# Altium PCB PDB_PCB.PcbDoc (part 2 of 2)
Units mil, origin at the board's own origin, x right, y up, seen from the top; angles counter-clockwise.
Board outline 5500 x 4505 mil, 2 copper layers (Top Layer, Bottom Layer); 322 components, 128 nets, 931 pads, 46 vias.
Unrouted connection lines stored in the file: 604.
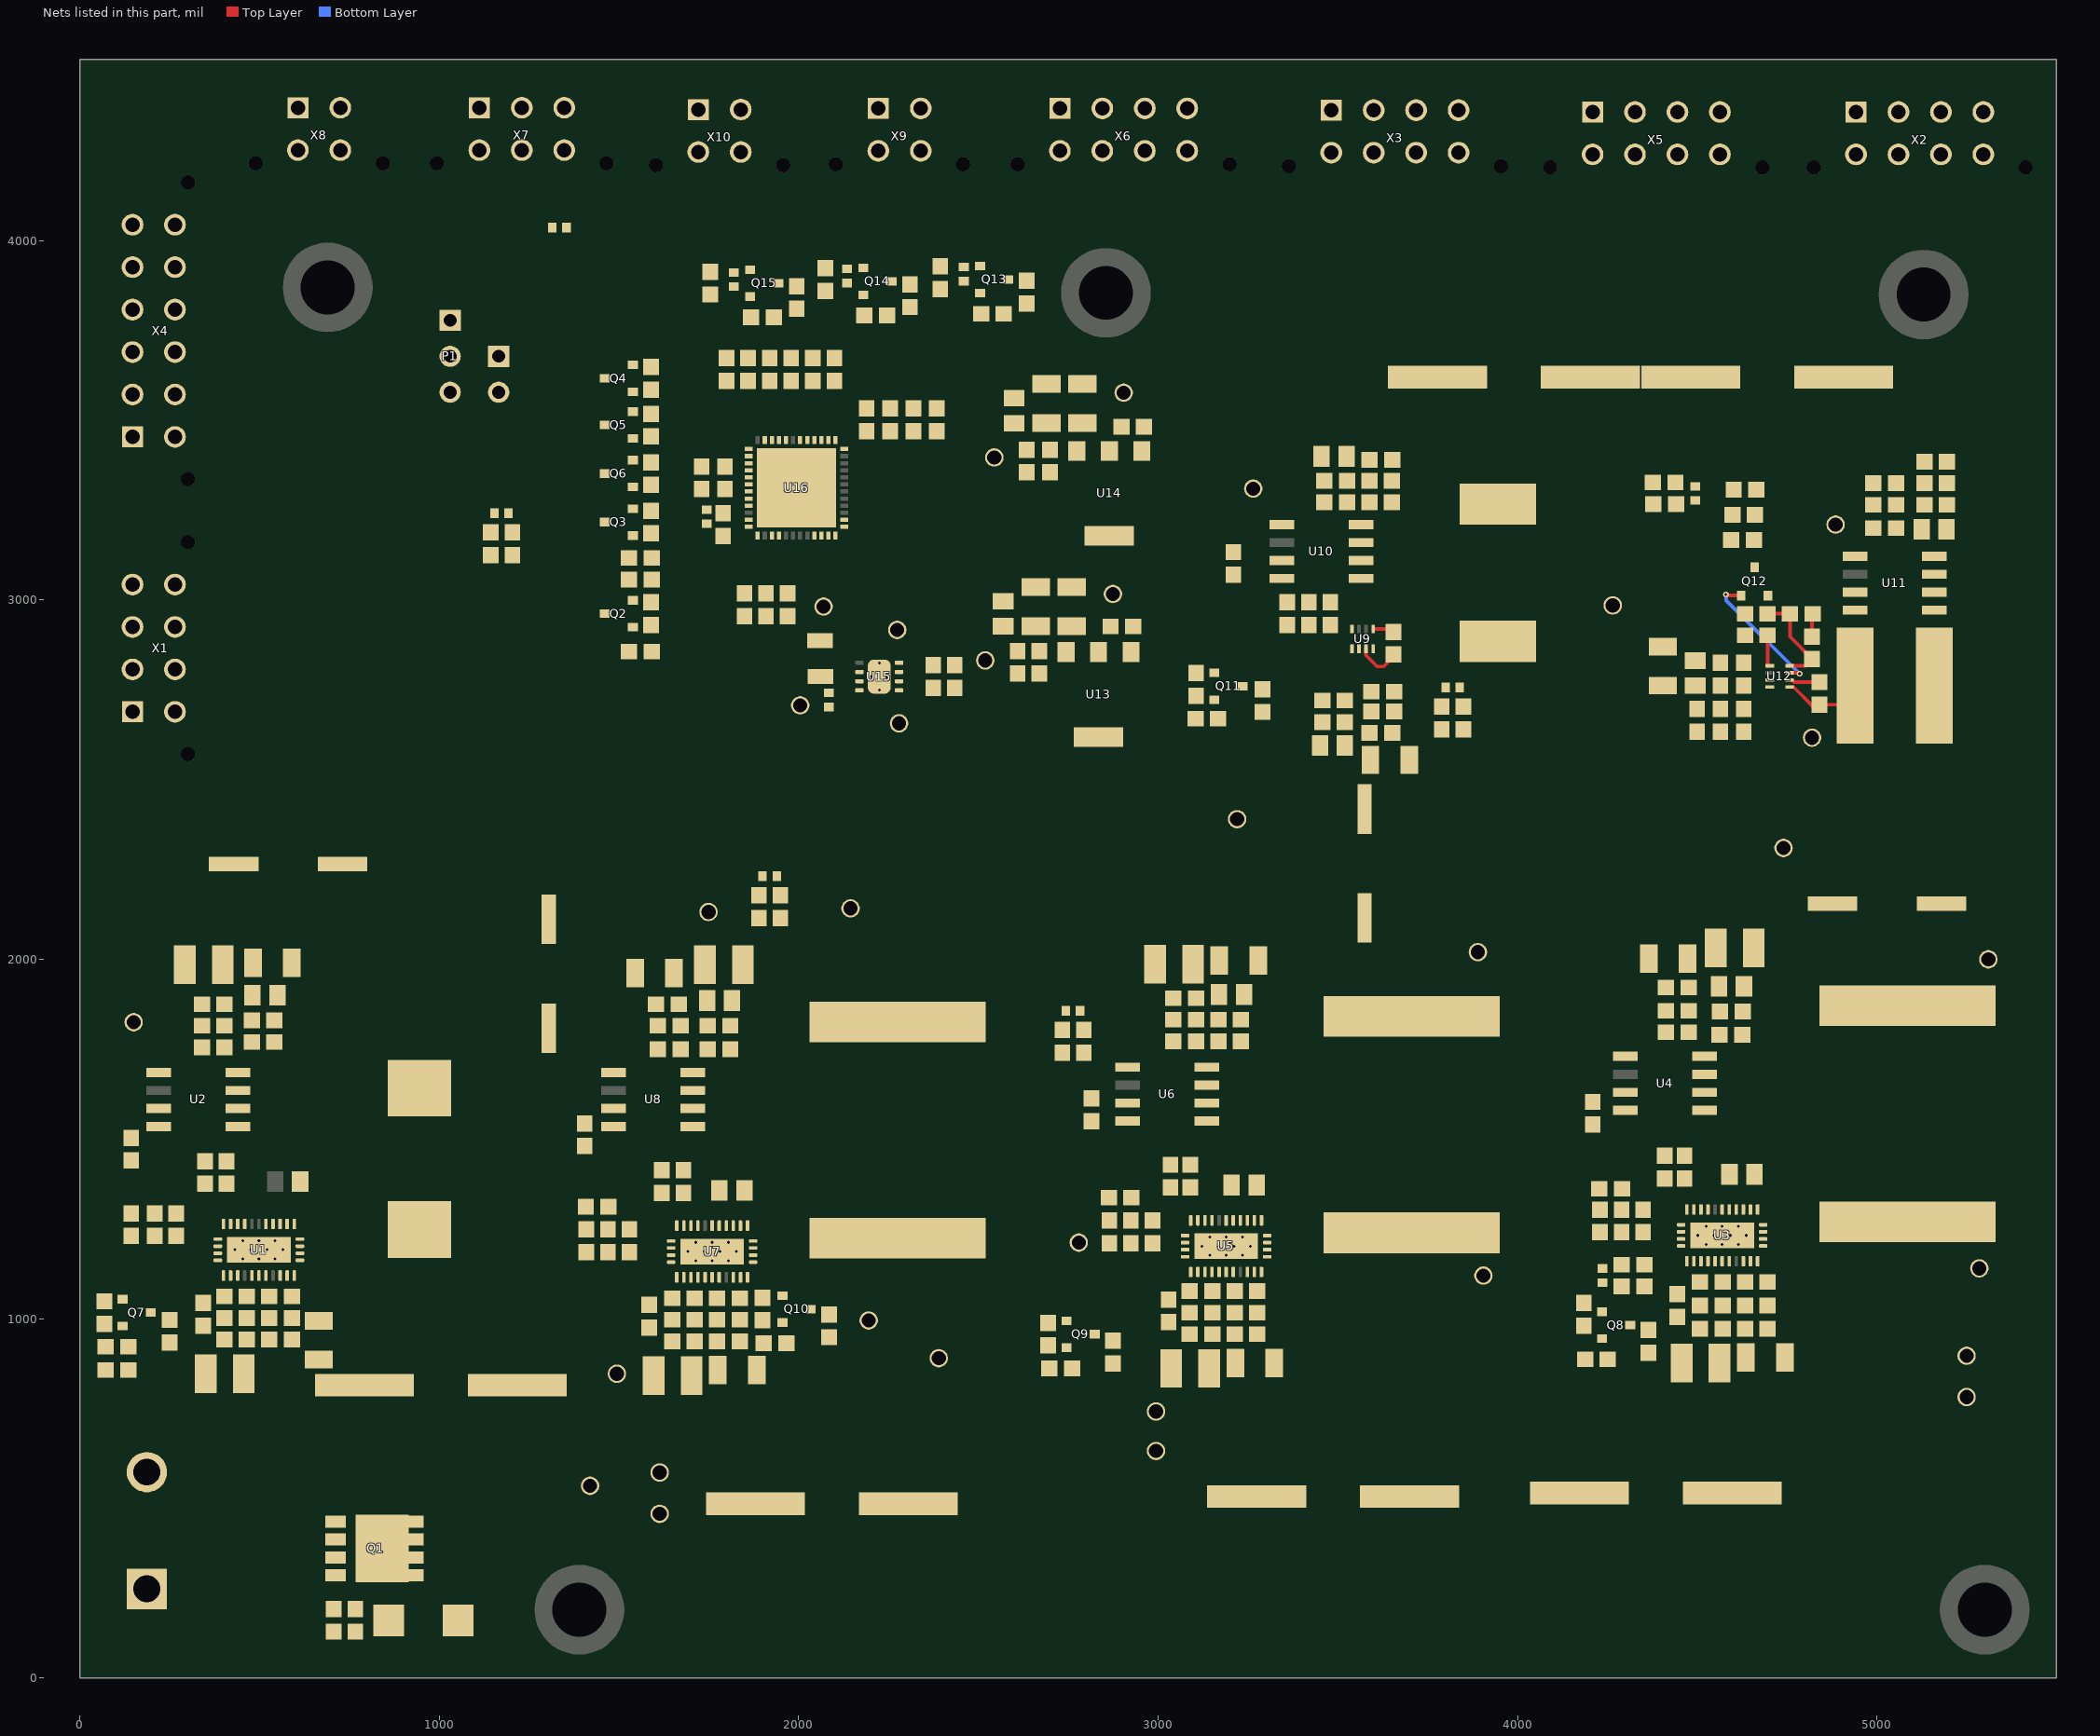
[diagram p2: the nets of this part, all layers, seen from the top]

## Part data
C1 C24 C47 C70 C102 C112: library part ELEC-100U-0001, "100 µF 100 V Aluminum Electrolytic Capacitors Radial, Can - SMD 2000 Hrs @ 85°C", Capacitance="100 uF", Manufacturer=Rubycon, Tolerance="+/- 20%", Voltage="100 V", Assembled?=No, ESR="idk check the datasheet i couldnt find it"
C2 C14: library part CAP-10U-0004, "10 µF ±10% 75V Ceramic Capacitor X7R 1210 (3225 Metric)", Capacitance="10 uF +/- 10%", Voltage Rating=75V
C3 C15: library part CAP-1U-0001, "1 µF ±10% 100V Ceramic Capacitor X7R 1206 (3216 Metric)", Capacitance="1 uF +/- 10%", Voltage=100V
C4 C11 C17 C23 C32 C37 C55 C60 C78 C83 C97 C100 C106 C110 C111 C116 C123 C126 C127 C134 C140 C142 C143 C144 C146 C150: library part CAP-100N-0001, "CAP CER 0.1UF 100V X7R 0603", Capacitance="100nF +/-10%", Manufacturer=YAGEO, Package Size=0603, Temperature Coefficient=X7R, Voltage Rating=100V, Assembled?=no, Manufacturer Part Number=CC0603KRX7R0BB104
C5 C18 C96 C105 C115 C122: library part CAP-10N-0002, "CAP CER 10000PF 100V C0G 0603", Capacitance="10nF +/-5%", Manufacturer="TDK Corporation", Package Size=0603, Temperature Coefficient=C0G/NP0, Voltage Rating=100V, Assembled?=no, Manufacturer Part Number=C1608C0G2A103J080AC
C6 C19 C98 C104 C114 C124: library part CAP-1N-0001, "1000 pF ±10% 100V Ceramic Capacitor X7R 0603 (1608 Metric)", Capacitance="1 nF +/-10%", Voltage=100V
C7 C20 C30 C45 C53 C68 C76 C91 C99 C107 C117 C125: library part CAP-100P-0002, "100 pF ±5% 100V Ceramic Capacitor C0G, NP0 0603 (1608 Metric)", Capacitance="100 pF", Package Size=0603, Temp Coeff=C0G/NP0, Tolerance=+/-5%, Voltage=100V
C8 C21: library part CAP-10P-0001, "10 pF ±5% 50V Ceramic Capacitor C0G, NP0 0603 (1608 Metric)", Capacitance="10 pF +/- 5%", Manufacturer="Walshin Technology Corporation", Package Size=0603, Temperature Coefficient="C0G, NP0", Voltage Rating=50V, Assembled?=Yes, Manufacturer Part Number=0603N100J500CT
C9: library part CAP-2.2U-0001, "2.2 µF ±10% 50V Ceramic Capacitor X5R 0603 (1608 Metric)", Capacitance="2.2 uF", oltage=50V
C10: library part CAP-33N-0001, "0.033 µF ±10% 50V Ceramic Capacitor X7R 0603 (1608 Metric)", Capacitance="33nF +/-10%", Manufacturer=YAGEO, Package Size=0603, Temperature Coefficient=X7R, Voltage Rating=50V, Assembled?=no, Manufacturer Part Number=CC0603KRX7R9BB333
C12 C16 C34 C41 C57 C64 C80 C87 C95 C103 C113 C121 C133 C139: library part CAP-0.47U-0001, "0.47 µF ±10% 100V Ceramic Capacitor X7R 0805 (2012 Metric)", Capacitance="0.47 uF", Package Size=0805, Temperature Coefficient=X7R, Tolerance="+/- 10%", Voltage=100V, Assembled?=No
C13: library part ELEC-220U-0003, "220 µF 50 V Aluminum Electrolytic Capacitors Radial, Can - SMD 2000 Hrs @ 105°C", Capacitance="220 uF +/- 20%", Voltage Rating=50V, Size=.406inx.406in*.413in
C22 C33 C56 C79: library part CAP-1P-0001, "1 pF ±0.25pF 100V Ceramic Capacitor C0G, NP0 0603 (1608 Metric)", Capacitance="1 pF", Package Size=0603, Temperature Coefficient=C0G/NP0, Tolerance="+/- 0.25 pF", Voltage=100V, Assembled?=No
C25 C39 C48 C62 C71 C85: library part CAP-10U-0004, "10 µF ±10% 75V Ceramic Capacitor X7R 1210 (3225 Metric)", Capacitance="10 uF", Voltage Rating=75V
C26 C40 C49 C63 C72 C86: library part CAP-1U-0001, "1 µF ±10% 100V Ceramic Capacitor X7R 1206 (3216 Metric)", Capacitance="1 uF", Voltage=100V
C27 C42 C50 C65 C73 C88: library part CAP-100N-0001, "CAP CER 0.1UF 100V X7R 0603", Capacitance=100nF, Manufacturer=YAGEO, Package Size=0603, Temperature Coefficient=X7R, Voltage Rating=100V, Assembled?=no, Manufacturer Part Number=CC0603KRX7R0BB104
C28 C43 C51 C66 C74 C89: library part CAP-10N-0002, "CAP CER 10000PF 100V C0G 0603", Capacitance=10nF, Manufacturer="TDK Corporation", Package Size=0603, Temperature Coefficient=C0G/NP0, Voltage Rating=100V, Assembled?=no, Manufacturer Part Number=C1608C0G2A103J080AC
C29 C44 C52 C67 C75 C90: library part CAP-1N-0001, "1000 pF ±10% 100V Ceramic Capacitor X7R 0603 (1608 Metric)", Capacitance="1 nF", Voltage=100V
C31 C46 C54 C69 C77 C92: library part CAP-10P-0001, "10 pF ±5% 50V Ceramic Capacitor C0G, NP0 0603 (1608 Metric)", Capacitance="10 pF", Manufacturer="Walshin Technology Corporation", Package Size=0603, Temperature Coefficient="C0G, NP0", Voltage Rating=50V, Assembled?=Yes, Manufacturer Part Number=0603N100J500CT
C35 C58 C81 C94 C120 C132 C138 C145 C147: library part CAP-1U-0002, "1 µF ±10% 50V Ceramic Capacitor X7R 0603 (1608 Metric)", Capacitance="1 uF", Package Size=0603, Voltage=50V
C36 C59 C82: library part CAP-33N-0001, "0.033 µF ±10% 50V Ceramic Capacitor X7R 0603 (1608 Metric)", Capacitance=33nF, Manufacturer=YAGEO, Package Size=0603, Temperature Coefficient=X7R, Voltage Rating=50V, Assembled?=no, Manufacturer Part Number=CC0603KRX7R9BB333
C38 C61 C84: library part ELEC-220U-0003, "220 µF 50 V Aluminum Electrolytic Capacitors Radial, Can - SMD 2000 Hrs @ 105°C", Capacitance="220 uF", Voltage Rating=50V, Size=.406inx.406in*.413in
C93 C119 C130 C131 C136 C137: library part CAP-10U-0001, "10 µF ±10% 50V Ceramic Capacitor X7R 1206 (3216 Metric)", Capacitance="10uF +/-20%", Manufacturer="Samsung Electro-Mechanics", Package Size=1206, Temperature Coefficient=X7R, Voltage Rating=50V, Assembled?=no, Manufacturer Part Number=CL31B106KBHNNNE
C101: library part CAP-100N-0002-JLC, "100V 100nF X7R ±10% 0603 Multilayer Ceramic Capacitors MLCC - SMD/SMT ROHS", Capacitance="100 nF +/- 10%", JLC Part Number=C113803, Voltage=100V, Assembled?=yes
C108 C109 C118 C128: library part CAP-47P-0001, "47 pF ±5% 100V Ceramic Capacitor C0G, NP0 0603 (1608 Metric)", Capacitance="47 pF +/- 5%", Voltage Rating=100V
C129 C135: library part CAP-0.33uF-0001, "0.33 µF ±10% 50V Ceramic Capacitor X7R 0603 (1608 Metric)", Capacitance="0.33 uF", Manufacturer="TDK Corporation", Temperature Coefficient=X7R, Tolerance="+/- 10%", Voltage=50V, Manufacturer Part Number=CGA3E3X7R1H334K080AB
C141 C149: library part CAP-4.7U-0001, "4.7 µF ±10% 25V Ceramic Capacitor X5R 0603 (1608 Metric)", Capacitance="4.7uF +/-10%", Manufacturer="Taiyo Yuden", Package Size=0603, Temperature Coefficient=X5R, Voltage Rating=25V, Assembled?=no, Manufacturer Part Number=TMK107BBJ475KA-T
C148: library part CAP-10N-0001, "10000 pF ±10% 100V Ceramic Capacitor X7R 0402 (1005 Metric)", Capacitance="10nF +/-10%", Manufacturer=YAGEO, Package Size=0402, Temperature Coefficient=X7R, Voltage Rating=100V, Assembled?=no, Manufacturer Part Number=CC0402KRX7R0BB103
D1: library part DIO-69.4V-0001, "69.4V Clamp 8.7A Ipp Tvs Diode Surface Mount DO-214AA (SMBJ)", Breakdown VOltage=47.8V, Package="DO-214AA (SMBJ)", Peak pulser current=8.7A, Reverse working maximum voltage=43V, Channels=Bidirectional, Vclamp=69.4V
D2 D3 D4 D5 D6 D7 D8 D9 D10: library part LED_Amber_0001, "CAP CER 0.1UF 100V X7R 0603", Color=Amber, Current Rating=20mA, Manufacturer="Wurth Electronik", Package Size=0603, Assembled?=no, Manufacturer Part Number=150060AS75000, Vf=2V
J1: library part CON-2POS-0003
L1: library part PWRIND-10U-0002, "10 µH Shielded Drum Core, Wirewound Inductor 10 A 16.8mOhm Max Nonstandard", Inductance="10 uH", Tolerance="+/- 20%", Assembled?=No, DCI="10 A", DCR="16.8 mOhm", Isat=16A
L2 L3 L4: library part PWRIND-8.2U-0002, "8.2 µH Shielded Molded Inductor 18 A 10.66mOhm Max Nonstandard", Inductance="8.2 uH", Tolerance=+/-20%, DCI=18A, DCR="10.66 mOhm", Isat=25A
L5: library part PWRIND-3.3U-0003, "3.3 µH Shielded Drum Core, Wirewound Inductor 6.8 A 15mOhm Max Nonstandard", Inductance="3.3 uH", Tolerance=30%, Assembled?=No, DCI="6.8 A", DCR="15 mOhm", Isat=6.5A
L6: library part PWRIND-1U-0001, "1 µH Semi-Shielded Drum Core, Wirewound Inductor 7.8 A 10mOhm Max Nonstandard", Inductance="1 uH", Tolerance=30%, Assembled?=No, DCI=7.8A, DCR="10 mOhm", Isat=11A
P1: "Header, 3-Pin", LatestRevisionDate=17-Jul-2002, LatestRevisionNote="Re-released for DXP Platform.", Publisher="Altium Limited"
P2: "Header, 2-Pin", LatestRevisionDate=17-Jul-2002, LatestRevisionNote="Re-released for DXP Platform.", Publisher="Altium Limited"
Q1: library part NMOS-60A-0001, "N-Channel 60 V 60A (Tc) 81W (Tc) Surface Mount 8-SOP Advance (5x5)", Drain Current=60A, Package=8-PowerVDFN, Vdss=60V, Vgs="2.5V @ 220uA", Vgs(Max)=20V
Q2 Q3 Q4 Q5 Q6 Q7 Q8 Q9 Q10 Q11 Q12 Q13 Q14 Q15: library part NMOS-200MA-0001, "MOSFET N-CH 60V 200MA SOT23", Manufacturer=Toshiba, Package=SOT-23-3, Assembled?=no, FET type=N-Channel, Id-Continuous=200mA, Manufacturer Part Number=T2N7002AK,LM, Rds On-Max=3.9Ohm, VDS-Max=60V, Vgs-Max=20V
R1: library part RES-200K-0001, "200 kOhms ±1% 0.1W, 1/10W Chip Resistor 0603 (1608 Metric) Automotive AEC-Q200 Thick Film", Manufacturer="Panasonic Electronic Components", Package Size=0603, Power Rating="0.1 W", Resistance="200k +/- 1%", Assembled?=Yes, MFP=ERJ-3EKF2003V
R2 R10 R16 R20 R23 R30 R32 R39 R41: library part RES-100K-0003, "100 kOhms ±1% 0.1W, 1/10W Chip Resistor 0603 (1608 Metric) Moisture Resistant Thick Film", Package Size=0603, Power="1/10 W", Resistance="100 kOhm", Tolerance="+/- 1%", Assembled?=No
R3: library part RES-10K-0001, "RES 10K OHM 1% 1/16W 0402", Manufacturer=YAGEO, Package Size=0402, Power Rating=1/16W, Resistance="10kOhm +/-1%", Assembled?=no, Manufacturer Part Number=RC0402FR-0710KL
R4 R5 R6 R7 R8: library part RES-0-0001, "0 Ohms Jumper 0.1W, 1/10W Chip Resistor 0603 (1608 Metric) Automotive AEC-Q200 Thick Film", Package Size=0603, Power="1/10 W", Resistance=10kOhm
R9 R18 R27 R36: library part RES-2.15M-0001, "2.15 MOhms ±1% 0.1W, 1/10W Chip Resistor 0603 (1608 Metric) Moisture Resistant Thick Film", Package Size=0603, Power="1/10 W", Resistance="2.15 MOhm", Tolerance=+/-1%, Assembled?=No
R11 R22 R31 R40 R52 R60 R61 R62: library part RES-100-0002, "100 Ohms ±1% 0.1W, 1/10W Chip Resistor 0603 (1608 Metric) Automotive AEC-Q200 Thick Film", Manufacturer=YAGEO, Package Size=0603, Power Rating=1/10W, Resistance="100Ohm +/-1%", Assembled?=no, Manufacturer Part Number=AC0603FR-10100RL
R12 R14 R19 R24 R28 R33 R37 R42 R46 R47 R50 R54 R57 R66 R67 R68: library part RES-10K-0002, "RES SMD 10K OHM 1% 1/10W 0603", Manufacturer=YAGEO, Package Size=0603, Power Rating=1/10W, Resistance="10kOhm +/-1%", Assembled?=no, Manufacturer Part Number=RC0603FR-0710KP
R13 R26 R35 R44: library part RES-76.8K-0001, "76.8 kOhms ±1% 0.1W, 1/10W Chip Resistor 0603 (1608 Metric) Moisture Resistant Thick Film", Manufacturer=Yageo, Package Size=0603, Power="1/10 W", Resistance="76.8 kOhm", Tolerance="+/- 1%"
R15 R21 R29 R38 R48 R56: library part THERM-47K-0001, "PTC Thermistor 47 kOhms 0402 (1006 Metric)", Manufacturer="Texas Instruments", Package Size=0402, Resistance="47k +/- 1%", Manufacturer Part Number=TMP6431DECR
R17: library part RES-4.32K-0001, "4.32 kOhms ±1% 0.1W, 1/10W Chip Resistor 0603 (1608 Metric) Moisture Resistant Thick Film", Package Size=0603, Power="1/10 W", Resistance="4.32 kOhm", Tolerance=+/-1%, Assembled?=No
R25 R34 R43 R51: library part RES-9.09K-0001, "9.09 kOhms ±1% 0.1W, 1/10W Chip Resistor 0603 (1608 Metric) Moisture Resistant Thick Film", Package Size=0603, Power="1/10 W", Resistance="9.09 kOhm", Tolerance=+/-1%, Assembled?=No
R45: library part RES-220-003, "220 Ohms ±5% 0.1W, 1/10W Chip Resistor 0603 (1608 Metric) Automotive AEC-Q200, Moisture Resistant Thick Film", Package Size=0603, Power="1/10 W", Resistance="220 Ohm", Tolerance="+/- 5%"
R49: library part RES-73.2K-0001, "73.2 kOhms ±1% 0.1W, 1/10W Chip Resistor 0603 (1608 Metric) Moisture Resistant Thick Film", Package Size=0603, Power="1/10 W", Resistance="73.2 kOhm", Tolerance=1%, Assembled?=No
R53: library part RES-4.7K-0002, "RES SMD 4.7K OHM 1% 1/10W 0603", Manufacturer=YAGEO, Package Size=0603, Power Rating=1/10W, Resistance="4.7kOhm +/-1%", Assembled?=no, Manufacturer Part Number=AF0603FR-074K7L
R55: library part RES-30.9K-0001, "30.9 kOhms ±1% 0.1W, 1/10W Chip Resistor 0603 (1608 Metric) Moisture Resistant Thick Film", Package Size=0603, Power="1/10 W", Resistance="30.9 kOhm", Tolerance=1%, Assembled?=No
R58: library part RES-4.7K-0001, "RES SMD 4.7K OHM 1% 1/16W 0402", Manufacturer=YAGEO, Package Size=0402, Power Rating=1/16W, Resistance="4.7kOhm +/-1%", Assembled?=no, Manufacturer Part Number=RC0402FR-074K7P
R59: library part RES-120-0002, "120 Ohms ±1% 0.5W, 1/2W Chip Resistor 1206 (3216 Metric) Thick Film", Package Size=1206, Power="0.5 W", Resistance="120 Ohm", Tolerance=1%
R63 R64 R65: library part RES-33-0003-JLC, "100mW Thick Film Resistors ±100ppm/℃ ±1% -55℃~+155℃ 33Ω 0402  Chip Resistor - Surface Mount ROHS", JLC Part Number=C278594, Power="1/10 W", Resistance="33 Ohm +/- 1%", Assembled?=yes
R69 R70 R71 R72 R73 R74 R75 R76 R77 R78 R79 R80: library part RES-0-0001, "0 Ohms Jumper 0.1W, 1/10W Chip Resistor 0603 (1608 Metric) Automotive AEC-Q200 Thick Film", Package Size=0603, Resistance="0 Ohm"
TP1 TP2 TP3 TP4 TP5 TP6 TP7 TP8 TP9 TP10 TP11 TP12 TP13 TP14 TP15 TP16 TP17 TP18 TP19 TP20 TP21 TP22 TP23 TP24 TP25 TP26 TP27 TP28 TP29 TP30 TP31 TP32: library part TEST-POINT-0001, "Oranange PC Test Point, Miniature Phoisphor Bronze Silver Plating Through Hole Mounting Type"
U1: library part IC-BUCK-0006, "Buck Switching Regulator IC Positive Adjustable 1V 1 Output 5A 30-WFQFN Exposed Pad", Current=5A, Manufacturer="Texas Instruments", Package=30-WFQFN, Assembled?=no, Manufacturer Part Number=LM76005RNPR, Type=Buck
U2 U4 U6 U8 U10 U11: library part IC-CURRENT-0004, "Current Sensor 1 Channel Hall Effect Bidirectional 8-SOIC (0.154\", 3.90mm Width)", Supply Voltage=5V, Assembled?=No
U3 U5 U7: library part IC-BUCK-0006, "Buck Switching Regulator IC Positive Adjustable 1V 1 Output 5A 30-WFQFN Exposed Pad", Manufacturer="Texas Instruments", Package=30-WFQFN, Assembled?=no, Current=LM76005RNPR, Manufacturer Part Number=LM76005RNPR, Type=Buck
U9: library part IC-BUCK-0008, "Buck Switching Regulator IC Positive Adjustable 0.6V 1 Output 3A SOT-583", Current=3A, Manufacturer="Texaas Instruments", Package Size=SOT-583, Assembled?=no, Manufacturer Part Number=TPS563212DRLR, Type=Buck
U12: library part IC-BUCK-0010, "Buck Switching Regulator IC Positive Adjustable 0.8V 1 Output 3A SOT-583", Current=3A, Manufacturer="Texas Instruments", Assembled?=no, Manufacturer Part Number=TPS62933ODRLR, Type=Buck
U13: library part IC-LDO-5V-0003, "Linear Voltage Regulator IC Positive Fixed 1 Output 500mA SOT-223-4", Current="500 mA", Manufacturer="Texas Instruments", Package Size=SOT223-4, Assembled?=no, Manufacturer Part Number=UA78M05IDCYR, Type="Low dropout (LDO)"
U14: library part IC-LDO-3.3V-0002, "Linear Voltage Regulator IC Positive Fixed 1 Output 500mA SOT-223-4", Current="500 mA", Package=SOT-223-4, Vin=25V, Vout=3.3V
U15: library part IC-CAN-TRANSCEIVER-0002, "1/1 Transceiver CANbus 8-VSON (3x3)", Manufacturer="Texas Instrument", CAN Capability=FD-CAN, Manufacturer Part Number=TCAN1042HGDRBTQ1
U16: library part IC-STM32G431CBU6, "128KB 1.71V~3.6V ARM-MSeries 32KB 170MHz FLASH 42 UFQFPN-48(7x7) Microcontroller Units (MCUs/MPUs/SOCs) ROHS", Package=UFQFPN-48, Assembled?=no, Manufacturer Part Number=STM32G431CBU6
X1 X2 X3 X5 X6: library part "Micro-Fit Molex 8 Pin 2 Row Vertical", Package=43045-0812, DeviceName=43045-0812, DeviceSetName=HEADER_POS8_?, GateName_1=G$1, LibraryName=con-molex-micro-fit-3_0_2, SymbolName_1=HEADER_POS8
X4: library part HEADER_POS12_?43045-1212, Package=43045-1212, DeviceName=43045-1212, DeviceSetName=HEADER_POS12_?, GateName_1=G$1, LibraryName=con-molex-micro-fit-3_0_2, SymbolName_1=HEADER_POS12
X7: library part "Micro-Fit Molex 6 Pin 2 Row Vertical", Package=43045-0612, DeviceName=43045-0612, DeviceSetName=HEADER_POS6_?, GateName_1=G$1, LibraryName=con-molex-micro-fit-3_0_2, SymbolName_1=HEADER_POS6
X8 X9 X10: library part "Micro-Fit Molex 4 Pin 2 Row Vertical", Package=43045-0412, DeviceName=43045-0412, DeviceSetName=HEADER_POS4_?, GateName_1=G$1, LibraryName=con-molex-micro-fit-3_0_2, SymbolName_1=HEADER_POS4

## Free pads (board coordinates)
  round 250 hole 150: ""(690,3870) ""(1390,190) ""(2855,3855) ""(5130,3850) ""(5300,190)

## Via types
v1: diameter 11.81, hole 7.87, Top Layer to Bottom Layer, 44 vias
v2: diameter 16, hole 8, Top Layer to Bottom Layer, 2 vias

## Nets (pads, with @x,y where several pads share a name; then routed paths per layer and width w, separated by ;. In a path a pad name is that pad's centre, name@x,y a point inside that pad or via, vN(x,y) a via of type N, cw(c..) or ccw(c..) an arc to the next point about the centre after c; other vN are vias at no path point)
"3V3 TMP": R54.2 R56.2
3V3_BUCK_MAIN: C23.1 C37.1 C60.1 C83.1 C110.1 C111.2 C112.1 C113.1 C114.1 C115.1 C116.1 C117.1 C118.1 R3.1 TP23.1 U2.8 U4.8 U6.8 U8.8 U10.8 U11.3 U11.4 U11.8 X5.P$5 X5.P$6 X5.P$7 X5.P$8
3V3_BUCK_OUT: C128.1 L6.2 R52.1 R53.1 R55.1 U11.1 U11.2 | length 64.1
  Top Layer w10: C128.1@4819.47,2898.31 4819.47,2960.31 R55.1@4820.97,2961.81
5V: C130.1 C131.1 C132.1 C133.2 C134.1 C149.1 C150.1 TP25.1 U13.3 U15.3
5V_BUCK_MAIN: C102.1 C103.1 C104.1 C105.1 C106.1 C107.1 C108.1 TP21.1 U10.3 U10.4 X3.P$5 X3.P$6 X3.P$7 X3.P$8 X6.P$5 X6.P$6 X6.P$7 X6.P$8 X8.P$4
5V_BUCK_OUT: C109.2 L5.2 R45.1 R47.2 R49.1 U10.1 U10.2
5V_FB: C109.1 R49.2 R50.1 U9.8
5V_TEMP_OUT: R46.2 R48.2
12V_BUCK_EN: R27.1 R30.1 U5.18
12V_BUCK_FB: C56.2 R32.2 R34.1 TP14.1 U5.12
12V_BUCK_MAIN: C61.1 C62.1 C63.1 C64.1 C65.1 C66.1 C67.1 C68.1 C69.1 C93.1 C94.1 C95.1 C96.1 C97.1 C98.1 C99.1 C119.1 C120.1 C121.1 C122.1 C123.1 C124.1 C125.1 C129.1 C135.1 TP15.1 U6.3 U6.4 U9.2 U12.3 U13.1 U14.1
12V_BUCK_OUT: C56.1 C58.1 L3.2 R32.1 TP12.1 U5.9 U6.1 U6.2
12V_BUCK_PG: Q9.1 R33.1 U5.16
12V_BUCK_VCC: R31.1 R33.2 U5.8
12V_JETSON_EN: R18.1 R20.1 U3.18
12V_JETSON_FB: C33.2 R23.2 R25.1 U3.12
12V_JETSON_MAIN: C38.1 C39.1 C40.1 C41.1 C42.1 C43.1 C44.1 C45.1 C46.1 TP9.1 U4.3 U4.4 X2.P$5 X2.P$6 X2.P$7 X2.P$8
12V_JETSON_OUT: C33.1 C35.1 L2.2 R23.1 TP7.1 U3.9 U4.1 U4.2
12V_JETSON_PG: Q8.1 R24.1 U3.16
12V_JETSON_VCC: R22.1 R24.2 U3.8
12V_REST_EN: R36.1 R39.1 U7.18
12V_REST_FB: C79.2 R41.2 R43.1 U7.12
12V_REST_MAIN: C84.1 C85.1 C86.1 C87.1 C88.1 C89.1 C90.1 C91.1 C92.1 TP20.1 U8.3 U8.4 X4.P$7 X4.P$8 X4.P$9 X4.P$10 X4.P$11 X4.P$12 X8.P$3
12V_REST_OUT: C79.1 C81.1 L4.2 R41.1 TP18.1 U7.9 U8.1 U8.2
12V_REST_PG: Q10.1 R42.1 U7.16
12V_REST_VCC: R40.1 R42.2 U7.8
24V_BUCK_MAIN: C13.1 C14.1 C15.1 C16.1 C17.1 C18.1 C19.1 C20.1 C21.1 TP3.1 U2.3 U2.4 X1.P$5 X1.P$6 X1.P$7 X1.P$8
24V_BUCK_OUT: C22.1 L1.2 R16.1 U2.1 U2.2
24V_MAIN_EN: R9.1 R10.1 U1.18
24V_PGOOD: Q7.1 R14.1 U1.16
BLUE_LED_GND: Q2.3 X7.P$1
BOOT_5V_BUCK: C101.1 U9.5 | length 59.7
  Top Layer w10: U9.5@3598.53,2919.37 3647.13,2919.37 C101.1@3655,2911.5
BST_3V3_BUCK: C126.1 U12.6 | length 85.4
  Top Layer w10: U12.6@4757.03,2777.44 4763.76,2777.44 4769.53,2771.68 4772.57,2771.68 4772.75,2771.5 C126.1@4840,2771.5
CAN_N: R59.1 U15.6 X9.P$2 X10.P$2
CAN_P: R59.2 U15.7 X9.P$4 X10.P$4
CAN_STB: R58.2 U15.8 U16.38
CURR_3V3: R80.1 U16.5
CURR_5V: R79.1 U16.27
CURR_12V_BUCK: R72.2 U16.11
CURR_12V_JETSON: R73.2 U16.9
CURR_12V_REST: R78.1 U16.10
CURR_24V: R74.2 U16.8
DEBUG_LED_0: R63.1 U16.2
DEBUG_LED_1: R64.1 U16.3
DEBUG_LED_2: R65.1 U16.4
FB_3V3_BUCK: C128.2 R55.2 R57.1 U12.8 | length 284.7
  Top Layer w10: R57.1@4695.97,2961.81 R55.2@4757.98,2961.81 4757.98,2897.79 4819.47,2836.3 C128.2@4819.47,2835.31 4819.47,2834.33 4801.95,2816.81 U12.8@4757.03,2816.81
FB_24V_BUCK: C22.2 R16.2 R17.1 U1.12
FDCAN1_RX: U16.33
FDCAN1_TX: TP29.1 U15.1 U16.34
FDCAN_RX: TP30.1 U15.4
GND: C1.2 C2.2 C3.2 C4.2 C5.2 C6.2 C7.2 C8.2 C9.2 C10.2 C11.2 C13.2 C14.2 C15.2 C16.2 C17.2 C18.2 C19.2 C20.2 C21.2 C23.2 C24.2 C25.2 C26.2 C27.2 C28.2 C29.2 C30.2 C31.2 C32.2 C35.2 C36.2 C37.2 C38.2 C39.2 C40.2 C41.2 C42.2 C43.2 C44.2 C45.2 C46.2 C47.2 C48.2 C49.2 C50.2 C51.2 C52.2 C53.2 C54.2 C55.2 C58.2 C59.2 C60.2 C61.2 C62.2 C63.2 C64.2 C65.2 C66.2 C67.2 C68.2 C69.2 C70.2 C71.2 C72.2 C73.2 C74.2 C75.2 C76.2 C77.2 C78.2 C81.2 C82.2 C83.2 C84.2 C85.2 C86.2 C87.2 C88.2 C89.2 C90.2 C91.2 C92.2 C93.2 C94.2 C95.2 C96.2 C97.2 C98.2 C99.2 C100.2 C102.2 C103.2 C104.2 C105.2 C106.2 C107.2 C108.2 C110.2 C111.1 C112.2 C113.2 C114.2 C115.2 C116.2 C117.2 C118.2 C119.2 C120.2 C121.2 C122.2 C123.2 C124.2 C125.2 C127.2 C129.2 C130.2 C131.2 C132.2 C133.1 C134.2 C135.2 C136.2 C137.2 C138.2 C139.1 C140.2 C141.2 C142.2 C143.2 C144.2 C145.2 C146.2 C147.2 C148.2 C149.2 C150.2 D1.2 P1.3 P2.1 Q1.3 Q2.2 Q3.2 Q4.2 Q5.2 Q6.2 Q7.2 Q8.2 Q9.2 Q10.2 Q11.2 Q12.2 Q13.2 Q14.2 Q15.2 R2.1 R4.1 R5.1 R6.1 R7.1 R8.1 R10.2 R13.2 R15.1 R17.2 R20.2 R21.1 R25.2 R26.2 R29.1 R30.2 R34.2 R35.2 R38.1 R39.2 R43.2 R44.2 R48.1 R50.2 R51.2 R56.1 R57.2 R58.1 R66.2 R67.2 R68.2 TP1.1 TP6.1 TP11.1 TP17.1 TP27.1 TP28.1 TP31.1 TP32.1 U1.9 U1.13 U1.14 U1.15 U1.17 U1.24 U1.25 U1.26 U1.27 U1.28 U1.29 U1.30 U1.31 U2.5 U3.13 U3.14 U3.15 U3.17 U3.19 U3.24 U3.25 U3.26 U3.27 U3.28 U3.29 U3.30 U3.31 U4.5 U5.13 U5.14 U5.15 U5.17 U5.19 U5.24 U5.25 U5.26 U5.27 U5.28 U5.29 U5.30 U5.31 U6.5 U7.13 U7.14 U7.15 U7.17 U7.19 U7.24 U7.25 U7.26 U7.27 U7.28 U7.29 U7.30 U7.31 U8.5 U9.4 U10.5 U11.5 U12.4 U13.2 U14.2 U15.2 U15.9 U16.49 X1.P$1 X1.P$2 X1.P$3 X1.P$4 X2.P$1 X2.P$2 X2.P$3 X2.P$4 X3.P$1 X3.P$2 X3.P$3 X3.P$4 X4.P$1 X4.P$2 X4.P$3 X4.P$4 X4.P$5 X4.P$6 X5.P$1 X5.P$2 X5.P$3 X5.P$4 X6.P$1 X6.P$2 X6.P$3 X6.P$4 X9.P$1 X9.P$3 X10.P$1 X10.P$3
  other v1: 1714.59,1161.22 1759.47,1161.22 1804.35,1161.22 453.59,1166.22 498.47,1166.22 543.35,1166.22 3144.59,1176.22 3189.47,1176.22 3234.35,1176.22 1692.15,1186.81 1737.03,1186.81 1781.91,1186.81 1826.8,1186.81 431.15,1191.81 476.03,1191.81 520.91,1191.81 565.8,1191.81 3122.15,1201.81 3167.03,1201.81 3211.91,1201.81 3256.8,1201.81 4524.59,1206.22 4569.47,1206.22 4614.35,1206.22 1714.59,1212.4 1759.47,1212.4 1804.35,1212.4 453.59,1217.4 498.47,1217.4 543.35,1217.4 3144.59,1227.4 3189.47,1227.4 3234.35,1227.4 4502.15,1231.81 4547.03,1231.81 4591.91,1231.81 4636.8,1231.81 4524.59,1257.4 4569.47,1257.4 4614.35,1257.4 2224.47,2749.41 2246.13,2784.84 2202.82,2786.81 2224.47,2824.21
GREEN_LED_GND: Q3.3 X7.P$2
NetC10_1: C10.1 U1.11
NetC34_2: C34.2 U3.6
NetC36_1: C36.1 U3.11
NetC57_2: C57.2 U5.6
NetC59_1: C59.1 U5.11
NetC80_2: C80.2 U7.6
NetC82_1: C82.1 U7.11
NetD2_1: D2.1 R11.2
NetD2_2: D2.2 Q7.3
NetD3_1: D3.1 R22.2
NetD3_2: D3.2 Q8.3
NetD4_1: D4.1 R31.2
NetD4_2: D4.2 Q9.3
NetD5_1: D5.1 R40.2
NetD5_2: D5.2 Q10.3
NetD6_1: D6.1 R45.2
NetD6_2: D6.2 Q11.3
NetD7_1: D7.1 R52.2
NetD7_2: D7.2 Q12.3
NetD8_1: D8.1 R60.2
NetD8_2: D8.2 Q13.3
NetD9_1: D9.1 R61.2
NetD9_2: D9.2 Q14.3
NetD10_1: D10.1 R62.2
NetD10_2: D10.2 Q15.3
NetJ1_1: J1.1 Q1.2
NetQ1_1: Q1.1 R1.2 R2.2
NetQ2_1: Q2.1 R4.2 U16.19
NetQ3_1: Q3.1 R5.2 U16.16
NetQ4_1: Q4.1 R6.2 U16.13
NetQ5_1: Q5.1 R7.2 U16.14
NetQ6_1: Q6.1 R8.2 U16.15
NetQ13_1: Q13.1 R63.2 R66.1
NetQ14_1: Q14.1 R64.2 R67.1
NetQ15_1: Q15.1 R65.2 R68.1
NetR3_2: R3.2 X7.P$4 X7.P$5 X7.P$6
NetR12_2: R12.2 R15.2 R71.2
NetR13_1: R13.1 U1.10
NetR19_2: R19.2 R21.2 R70.2
NetR26_1: R26.1 U3.10
NetR28_2: R28.2 R29.2 R69.2
NetR35_1: R35.1 U5.10
NetR37_2: R37.2 R38.2 R75.2
NetR44_1: R44.1 U7.10
NetR51_1: R51.1 U12.1 | length 90.9
  Top Layer w10: R51.1@4695.97,2901.81 4695.97,2816.89 4696.05,2816.81 U12.1@4701.91,2816.81
NetR72_1: R72.1 U6.7
NetR73_1: R73.1 U4.7
NetR74_1: R74.1 U2.7
NetR76_2: R76.2
NetR77_2: R77.2
NetR78_2: R78.2 U8.7
NetR79_2: R79.2 U10.7
NetR80_2: R80.2 U11.7
NRST: P2.2
PG/SS_5V_BUCK: Q11.1 R47.1 U9.1
PG_3V3_BUCK: Q12.1 R53.2 U12.7 | length 376.9
  Top Layer w10: v2(4580,3015) 4582.56,3012.44 Q12.1@4622.07,3012.44 ; U12.7@4757.03,2797.12 4782.88,2797.12 v2(4785,2795)
  Bottom Layer w10: v2(4580,3015) 4581.15,3013.85 4581.15,2998.85 v2(4785,2795)
RA_LASER_GND: Q4.3 X8.P$1
RED_LED_GND: Q6.3 X7.P$3
SW_3V3_BUCK: C126.2 L6.1 TP24.1 U12.5 | length 210.2
  Top Layer w10: U12.5@4757.03,2757.75 4768.02,2757.75 4819.47,2706.3 C126.2@4819.47,2705.31 ; C126.2@4840,2708.5 4893.06,2708.5 4939.24,2754.68 L6.1@4939.24,2761.81
SW_5V_BUCK: C101.2 L5.1 TP22.1 U9.3 | length 119.5
  Top Layer w10: U9.3@3578.84,2864.25 3578.92,2864.17 3578.92,2846.08 3610,2815 3627.48,2815 3655,2842.52 C101.2@3655,2843.5
SW_12V_BUCK: C57.1 L3.1 TP13.1 U5.1 U5.2 U5.3 U5.4 U5.5
SW_12V_JETSON: C34.1 L2.1 TP8.1 U3.1 U3.2 U3.3 U3.4 U3.5
SW_12V_REST: C80.1 L4.1 TP19.1 U7.1 U7.2 U7.3 U7.4 U7.5
SW_24V_BUCK: C12.1 L1.1 TP4.1 U1.1 U1.2 U1.3 U1.4 U1.5
SWCLK: P1.1 U16.37
SWDIO: P1.2 U16.36
TEMP_3V3: R77.1 U16.28
TEMP_5V: R76.1 U16.6
TEMP_12V_BUCK: R69.1 U16.17
TEMP_12V_JETSON: R70.1 U16.18
TEMP_12V_REST: R75.1 U16.24
TEMP_24V: R71.1 U16.25
UV_LED_GND: Q5.3 X8.P$2
VBAT: C1.1 C2.1 C3.1 C4.1 C5.1 C6.1 C7.1 C8.1 C24.1 C25.1 C26.1 C27.1 C28.1 C29.1 C30.1 C31.1 C47.1 C48.1 C49.1 C50.1 C51.1 C52.1 C53.1 C54.1 C70.1 C71.1 C72.1 C73.1 C74.1 C75.1 C76.1 C77.1 D1.1 J1.2 R1.1 R9.2 R18.2 R27.2 R36.2 TP2.1 TP5.1 TP10.1 TP16.1 U1.20 U1.21 U1.22 U3.20 U3.21 U3.22 U5.20 U5.21 U5.22 U7.20 U7.21 U7.22
VBAT_MCU: C11.1 C32.1 C55.1 C78.1 C100.1 C127.1 C136.1 C137.1 C138.1 C139.2 C140.1 C141.1 C142.1 C143.1 C144.1 C145.1 C146.1 C147.1 C148.1 R12.1 R19.1 R28.1 R37.1 R46.1 R54.1 R60.1 R61.1 R62.1 TP26.1 U14.3 U16.1 U16.20 U16.21 U16.23 U16.35 U16.48
VCC_24V_BUCK: C9.1 R11.1 R14.2 U1.8
pads on no net: C12.2 U1.6 U1.7 U1.19 U1.23 U2.6 U3.7 U3.23 U4.6 U5.7 U5.23 U6.6 U7.7 U7.23 U8.6 U9.6 U9.7 U10.6 U11.6 U12.2 U15.5 U16.7 U16.12 U16.22 U16.26 U16.29 U16.30 U16.31 U16.32 U16.39 U16.40 U16.41 U16.42 U16.43 U16.44 U16.45 U16.46 U16.47 X1.1 X2.1 X3.1 X4.1 X5.1 X6.1 X7.1 X8.1 X9.1 X10.1

## Polygon pours and split planes (outlines as drawn)
SW_12V_REST on Top Layer "SW_12V_REST_L01_P020" (solid, pour order 20): 1770,1240 1935,1240 2010,1165 2525,1165 2525,1285 1945,1285 1935,1275 1770,1275
12V_BUCK_MAIN on Top Layer "12V_BUCK_MAIN_L01_P015" (solid, pour order 15): 3588.74,2814.9 3620,2783.63 3620,2555 3670,2505 4080,2505 4365,2790 4475,2680 4475,2665 4140,2330 3505,2330 3195,2020 3060,2020 3060,2120 3490,2550 3490,2775 3525,2810
3V3_BUCK_MAIN on Top Layer "3V3_BUCK_MAIN_L01_P019" (solid, pour order 19): 5195,3060 5195,3135 5160,3170 5160,3580 4635,4105 4635,4250 4585,4300 4200,4300 4135,4235 4135,4115 4565,3685 4685,3685 5025,3345 5025,3155 5120,3060
5V_BUCK_MAIN on Top Layer "5V_BUCK_MAIN_L01_P018" (solid, pour order 18): 3720,3520 3620,3420 3620,3245 3605,3230 3605,3145 3530,3145 3530,3220 3495,3255 3495,3445 2935,4005 2790,4005 2645,4150 2645,4260 2695,4310 3100,4310 3135,4275 3135,4200 3200,4135 3350,4135 3400,4185 3400,4250 3450,4300 3855,4300 3915,4240 3915,3595 3840,3520
SW_5V_BUCK on Top Layer "SW_5V_BUCK_L01_P017" (solid, pour order 17): 3645,2825 4050,2825 4050,2945 3745,2945 3670,2870 3635,2870 3635,2835
12V_BUCK_MAIN on Top Layer "12V_BUCK_MAIN_L01_P016" (solid, pour order 16): 3505,2790 3505,2785 3613.47,2785 3613.47,2790.25 3564.09,2839.62 3564.09,2875.18 3563.95,2875.32 3554.36,2875.51 3554.36,2839.36
12V_BUCK_MAIN on Top Layer "12V_BUCK_MAIN_L01_P000" (solid, pour order 0): 4713.48,2782.29 4713.21,2782.02 4687.98,2782.02 4680,2790 4365,2790 4365,2695 4335,2665 4655,2665 4675,2685 4675,2765 4682.47,2772.47 4713.5,2772.47
12V_BUCK_MAIN on Top Layer "12V_BUCK_MAIN_L01_P001" (solid, pour order 1): 3175,1635 3205,1665 3205,2045 3060,2045 3060,1925 3075,1910 3075,1660 3100,1635
SW_12V_BUCK on Top Layer "SW_12V_BUCK_L01_P002" (solid, pour order 2): 3205,1260 3375,1260 3455,1180 3955,1180 3955,1300 3305,1300 3295,1290 3205,1290
12V_BUCK_OUT on Top Layer "12V_BUCK_OUT_L01_P003" (solid, pour order 3): 3100,1615 3170,1615 3455,1900 3955,1900 3955,1785 3705,1535 3100,1535
SW_12V_JETSON on Top Layer "SW_12V_JETSON_L01_P004" (solid, pour order 4): 4585,1290 4755,1290 4835,1210 5335,1210 5335,1330 4685,1330 4675,1320 4585,1320
12V_JETSON_OUT on Top Layer "12V_JETSON_OUT_L01_P005" (solid, pour order 5): 4485,1645 4555,1645 4840,1930 5340,1930 5340,1815 5090,1565 4485,1565
12V_JETSON_MAIN on Top Layer "12V_JETSON_MAIN_L01_P006" (solid, pour order 6): 4557.5,1670 4587.5,1700 4587.5,2080 4442.5,2080 4442.5,1960 4457.5,1945 4457.5,1695 4482.5,1670
12V_REST_OUT on Top Layer "12V_REST_OUT_L01_P009" (solid, pour order 9): 1670,1600 1740,1600 2025,1885 2525,1885 2525,1770 2275,1520 1670,1520
12V_REST_MAIN on Top Layer "12V_REST_MAIN_L01_P010" (solid, pour order 10): 1742.5,1620 1772.5,1650 1772.5,2030 1627.5,2030 1627.5,1910 1642.5,1895 1642.5,1645 1667.5,1620
SW_24V_BUCK on Top Layer "SW_24V_BUCK_L01_P011" (solid, pour order 11): 515,1250 685,1250 765,1170 1035,1170 1035,1325 650,1325 605,1280 515,1280
24V_BUCK_OUT on Top Layer "24V_BUCK_OUT_L01_P012" (solid, pour order 12): 405,1600 475,1600 595,1720 1040,1720 1040,1520 405,1520
24V_BUCK_MAIN on Top Layer "24V_BUCK_MAIN_L01_P013" (solid, pour order 13): 305,2635 265,2635 205,2695 205,3075 220,3090 295,3090 507.5,2877.5 507.5,1650 477.5,1620 402.5,1620 377.5,1645 377.5,1895 362.5,1910 362.5,2577.5
12V_JETSON_MAIN on Top Layer "12V_JETSON_MAIN_L01_P014" (solid, pour order 14): 5275,2575 4935,2235 4597.5,2235 4442.5,2080 4442.5,2020 4580,2020 4585,2015 4587.5,2017.5 4587.5,2080 4590,2080 4640,2130 5010,2130 5385,2505 5385,4240 5335,4290 4900,4290 4860,4250 4860,4110 4945,4025 5210,4025 5275,3960